# EAGLE board untitled (EAGLE 5.10)

Size 100 x 80 mm. Coordinates in mm from the lower left corner, seen from the top.
Outline: 0,0 100,0 100,80 0,80 0,0
Copper layers (1*16): Top 0.035mm / dielectric 1.5mm / Bottom 0.035mm
Design rules "default": minimum track width 10mil, minimum drill 24mil, track to track 8mil, track to pad 8mil, pad to pad 8mil, via to via 8mil, smd to smd 8mil, copper to edge 40mil, drill to drill 8mil, minimum pad ring 10mil, minimum via ring 8mil, stop-mask expansion 4mil, vias tented up to drill 0mil, thermal gap 10mil
Milling: area 26,0 to 26.6,0; area 24.1,0 to 24.2,0.1; area 25.8,0 to 26.7,0.1; area 24.1,0.1 to 24.4,0.1; area 25.5,0.1 to 26.8,0.1; area 24.2,0.1 to 24.6,0.1; area 25.2,0.1 to 26.9,0.1; area 24.2,0.1 to 27,0.1; area 24.2,0.1 to 27,0.2; area 24.2,0.2 to 27,0.2; area 24.2,0.2 to 27.1,0.2; area 24.3,0.2 to 27.1,0.2; 5970 more areas

## Footprints (pad centres in the part's own frame; a part is rotated, then mirrored left to right if it is on the bottom)
3,81/1,3 = drill 1.321 pad 3.81 octagon: 1 0,0
SO08-EIAJ = smd 0.61 x 2.21: 1 -1.905,-3.378; 2 -0.635,-3.378; 3 0.635,-3.378; 4 1.905,-3.378; 5 1.905,3.353; 6 0.635,3.353; 7 -0.635,3.353; 8 -1.905,3.353

## Placement (x,y rotation side)
PAD1  [3,81/1,3]  6.12,10.6 0 top
PAD2  [3,81/1,3]  11.14,20.2 0 top
PAD3  [3,81/1,3]  5.89,16.15 0 top
PAD4  [3,81/1,3]  6.17,20.95 0 top
U$1  ATTINY45  [SO08-EIAJ]  25.49,47.49 270 top

## Library data of the parts
PAD1-PAD4 = wirepad
U$1 = SparkFun

## Text on the board
Milling: /Users/plusea/Desktop/13-Traces with Origin/typo/Traces with Origin_font.bmp
Measures: /Users/plusea/Desktop/13-Traces with Origin/typo/Traces with Origin_font.bmp